# Altium PCB HVBoard_PCB.PcbDoc (part 2 of 2)
Units mm, origin at the board's own origin, x right, y up, seen from the top; angles counter-clockwise.
Board outline 140 x 60 mm, 2 copper layers (Top Layer, Bottom Layer); 89 components, 40 nets, 274 pads, 535 vias.
Unrouted connection lines stored in the file: 6.
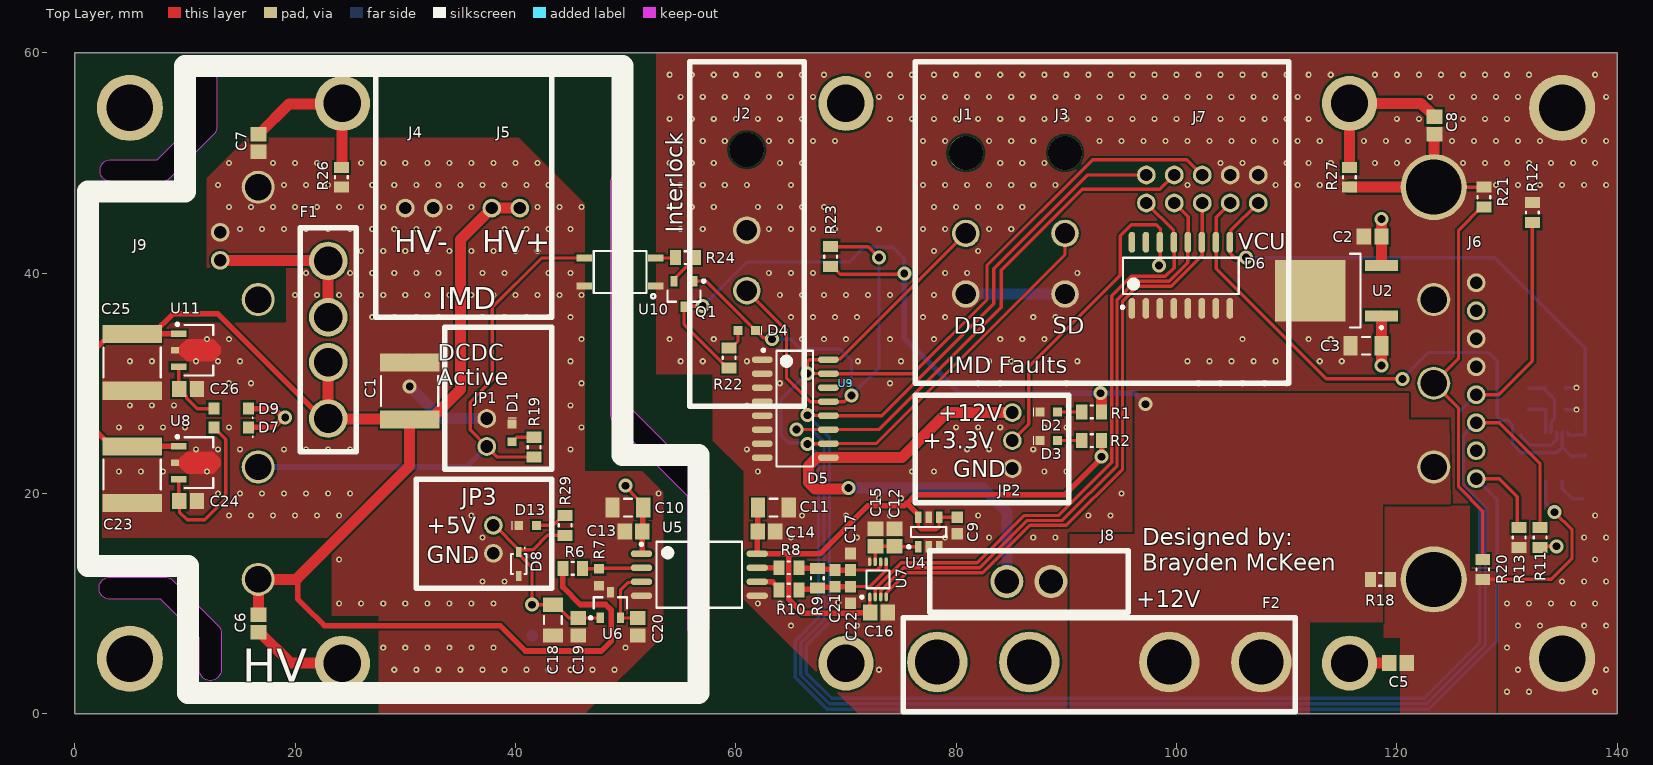
[diagram p0: Top Layer view]

## Part data (continued)
R24: library part 0805-1KR, "RES SMD 1K OHM 1% 1/8W 0805", Case Code (Imperial)=0805, Case Code (Metric)=2012, Manufacturer=Yageo, Manufacturer Part Number=RC0805FR-071KL, Max Operating Temperature=155°C, Max Power Dissipation=125mW, Min Operating Temperature=-55°C, Package Quantity=1, Resistance=1kR, Supplier Part Number 1=311-1.00KCRDKR-ND, Temperature Coefficient=100ppm/°C, Tolerance=1%, Voltage Rating=150V, Case/Package=0805, ComponentLink1Description=http://www.yageo.com/documents/recent/PYu-RC_Group_51_RoHS_L_10.pdf?src-supplier=Digi-Key, ComponentLink1URL=http://www.yageo.com/documents/recent/PYu-RC_Group_51_RoHS_L_10.pdf?src-supplier=Digi-Key, ComponentLink2Description=http://www.farnell.com/datasheets/1686128.pdf?src-supplier=Element14, ComponentLink2URL=http://www.farnell.com/datasheets/1686128.pdf?src-supplier=Element14, ComponentLink3Description=http://www.yageo.ru/pdf/RC0805.pdf?src-supplier=Future+Electronics, ComponentLink3URL=http://www.yageo.ru/pdf/RC0805.pdf?src-supplier=Future+Electronics, ComponentLink4Description=http://www.farnell.com/datasheets/2167052.pdf?src-supplier=Element14, ComponentLink4URL=http://www.farnell.com/datasheets/2167052.pdf?src-supplier=Element14, Composition="Thick Film", Depth=1.25mm, Features="Moisture Resistant", Height=0.024inch, Lead Free="Lead Free", Length=0.079inch, Military Standard=Not, Number of Pins=2, Number of Terminations=2, Packaging="Tape and Reel", Power Rating=125mW, Pricing 1="1=0.1, 10=0.04, 100=0.0163, 1000=0.00731, 2500=0.00635 (USD)", REACH SVHC=Unknown, Stock 1=21491700, Supplier 1=Digi-Key, Termination=SMD/SMT, Voltage Rating (DC)=150V, Width=0.049inch
R26 R27: library part 0805-10MR, "RES SMD 10M OHM 1% 1/8W 0805", Supplier Part Number 1=311-10.0MCRCT-ND, Supplier 1=Digi-Key
R29: library part 0805-665R, "RES SMD 665 OHM 1% 1/8W 0805", Case Code (Imperial)=0805, Case Code (Metric)=2012, Manufacturer=Panasonic, Manufacturer Part Number=ERJ-6ENF6650V, Max Operating Temperature=155°C, Max Power Dissipation=125mW, Min Operating Temperature=-55°C, Package Quantity=1, Supplier Part Number 1=P665CDKR-ND, Temperature Coefficient=100ppm/°C, Tolerance=1%, Voltage Rating=150V, Case/Package=0805, ComponentLink1Description=http://www.farnell.com/datasheets/1678782.pdf?src-supplier=Element14, ComponentLink1URL=http://www.farnell.com/datasheets/1678782.pdf?src-supplier=Element14, ComponentLink2Description=http://www.mouser.com/ds/2/315/AOA0000CE2-37512.pdf?src-supplier=Mouser, ComponentLink2URL=http://www.mouser.com/ds/2/315/AOA0000CE2-37512.pdf?src-supplier=Mouser, ComponentLink3Description=https://www.alliedelec.com/m/d/623f45ff1957d936ff56d46fd1c28cac.pdf?src-supplier=Allied+Electronics, ComponentLink3URL=https://www.alliedelec.com/m/d/623f45ff1957d936ff56d46fd1c28cac.pdf?src-supplier=Allied+Electronics, ComponentLink4Description=http://www.farnell.com/datasheets/1678782.pdf?src-supplier=Farnell, ComponentLink4URL=http://www.farnell.com/datasheets/1678782.pdf?src-supplier=Farnell, ComponentLink5Description=http://www.industrial.panasonic.com/www-data/pdf/AOA0000/AOA0000CE2.pdf?src-supplier=Element14, ComponentLink5URL=http://www.industrial.panasonic.com/www-data/pdf/AOA0000/AOA0000CE2.pdf?src-supplier=Element14, Composition="Thick Film", Contact Plating=Tin, Depth=1.25mm, Features="Automotive AEC-Q200", Height=0.6mm, Height - Seated (Max)=0.028inch, Lead Free="Lead Free", Length=2mm, Military Standard=Not, Mount="Surface Mount", Number of Terminations=2, Packaging="Tape and Reel", Power Rating=125mW, Pricing 1="1=0.1, 10=0.078, 100=0.0301, 1000=0.01324, 2500=0.01144 (USD)", REACH SVHC=Unknown, Resistance=665R, Stock 1=180910, Supplier 1=Digi-Key, Termination=SMD/SMT, Voltage Rating (DC)=150V, Width=0.049inch
U1: library part "PWR Monitor", "IC MONITOR PWR/CURR BIDIR 10MSOP", Case/Package=VSSOP, Input Bias Current=10uA, Input Offset Voltage (Vos)=2.5uV, Manufacturer="Texas Instruments", Manufacturer Part Number=INA226AIDGSR, Max Operating Temperature=125°C, Max Supply Voltage=5.5V, Min Operating Temperature=-40°C, Min Supply Voltage=2.7V, Nominal Supply Current=330uA, Output Current=10mA, Package Quantity=1, Accuracy=0.02%, Common Mode Rejection Ratio=140dB, ComponentLink1Description=http://www.ti.com/lit/ds/symlink/ina226.pdf?src-supplier=Digi-Key, ComponentLink1URL=http://www.ti.com/lit/ds/symlink/ina226.pdf?src-supplier=Digi-Key, ComponentLink2Description=http://www.ti.com/general/docs/lit/getliterature.tsp?genericPartNumber=INA226&&fileType=pdf&src-supplier=Avnet, ComponentLink2URL=http://www.ti.com/general/docs/lit/getliterature.tsp?genericPartNumber=INA226&&fileType=pdf&src-supplier=Avnet, ComponentLink3Description=http://www.ti.com/lit/gpn/ina226?src-supplier=Mouser, ComponentLink3URL=http://www.ti.com/lit/gpn/ina226?src-supplier=Mouser, ComponentLink4Description=http://www.farnell.com/datasheets/1840205.pdf?src-supplier=Element14, ComponentLink4URL=http://www.farnell.com/datasheets/1840205.pdf?src-supplier=Element14, Contact Plating=Gold, Lead Free="Lead Free", Mount="Surface Mount", Number of Pins=10, Packaging="Tape and Reel", Pricing 1="1=3.18, 10=2.856, 25=2.7, 100=2.22, 250=1.992, 500=1.92, 1000=1.596 (USD)", Radiation Hardening=No, REACH SVHC="No SVHC", Stock 1=12662, Supplier 1=Digi-Key, Supplier Part Number 1=296-29034-1-ND
U2: library part LDO-3.3V-500mA, "IC REG LINEAR 3.3V 500MA DPAK", Case/Package=DPAK, Dropout Voltage=230mV, Manufacturer="ON Semiconductor", Manufacturer Part Number=NCV5501DT33RKG, Max Input Voltage=16V, Max Operating Temperature=125°C, Max Output Current=500mA, Min Input Voltage=2.5V, Min Operating Temperature=-40°C, Min Output Voltage=3.3V, Output Voltage Accuracy=2.9%, Package Quantity=1, Supplier Part Number 1=NCV5501DT33RKGOSDKR-ND, Accuracy=2.9%, ComponentLink1Description=http://www.onsemi.com/pub_link/Collateral/NCP5500-D.PDF?src-supplier=Future+Electronics, ComponentLink1URL=http://www.onsemi.com/pub_link/Collateral/NCP5500-D.PDF?src-supplier=Future+Electronics, ComponentLink2Description=http://www.onsemi.cn/pub_link/Collateral/NCP5500-D.PDF?src-supplier=Avnet, ComponentLink2URL=http://www.onsemi.cn/pub_link/Collateral/NCP5500-D.PDF?src-supplier=Avnet, ComponentLink3Description=http://www.onsemi.com/pub/Collateral/NCP5500-D.PDF?src-supplier=Avnet, ComponentLink3URL=http://www.onsemi.com/pub/Collateral/NCP5500-D.PDF?src-supplier=Avnet, ComponentLink4Description=http://www.onsemi.com/pub/Collateral/NCP5500-D.PDF?src-supplier=Digi-Key, ComponentLink4URL=http://www.onsemi.com/pub/Collateral/NCP5500-D.PDF?src-supplier=Digi-Key, Contact Plating=Tin,Matte, Height=2.38mm, Lead Free="Lead Free", Length=6.73mm, Min Current Limit=500mA, Mount="Surface Mount", Nominal Output Voltage=3.3V, Number of Outputs=1, Number of Pins=3, Number of Regulators=1, Output Current=500mA, Output Type=Fixed, Output Voltage=3.3V, Packaging="Tape and Reel", Polarity=Positive, Pricing 1="1=0.8, 10=0.7, 25=0.6576, 100=0.4984, 250=0.4242, 500=0.403, 1000=0.30755 (USD)", Radiation Hardening=No, REACH SVHC="No SVHC", Stock 1=921, Supplier 1=Digi-Key, Width=6.22mm
U3: library part DCDC200V-12V, "DC DC CONVERTER 12V 500W", Case/Package="Full Brick", Isolation Voltage=3kV, Manufacturer=Vicor, Max Input Voltage=200V, Max Operating Temperature=100°C, Max Output Current=41.67A, Max Power Dissipation=500W, Min Input Voltage=100V, Min Operating Temperature=-20°C, Output Voltage=12V, Package Quantity=1, Supplier Part Number 1=1102-1229-ND, ComponentLink1Description=http://cdn.vicorpower.com/documents/datasheets/ds_150vin-maxi-family.pdf?src-supplier=Future+Electronics, ComponentLink1URL=http://cdn.vicorpower.com/documents/datasheets/ds_150vin-maxi-family.pdf?src-supplier=Future+Electronics, ComponentLink2Description=http://cdn.vicorpower.com/documents/datasheets/ds_150vin-maxi-family.pdf?src-supplier=Digi-Key, ComponentLink2URL=http://cdn.vicorpower.com/documents/datasheets/ds_150vin-maxi-family.pdf?src-supplier=Digi-Key, Efficiency=87.6%, Features=UVLO,OVP, Height=0.62inch, Isolation=Isolated, Lead Free="Contains Lead", Length=4.6inch, Manufacturer Part Number=V150A12C500BL, Mount="Through Hole", Number of Outputs=1, Output Power=500W, Packaging=Bulk, Pricing 1="1=313.93, 10=303.804 (USD)", Stock 1=3, Supplier 1=Digi-Key, Voltage - Output 1=12V, Width=2.2inch
U4: library part "VREF 2.048V 0.1%", "IC VREF SERIES 0.1% SOT23-6", Supplier 1=Digi-Key, Supplier Part Number 1=MCP1501T-20E/CHYCT-ND
U5: library part OPAMP-ISO-AMC1301DWVR, "IC OPAMP ISOLATION 1 CIRC 8SOIC", Case/Package=SOIC, Input Bias Current=60uA, Input Offset Voltage (Vos)=50uV, Isolation Voltage=1kV, Manufacturer="Texas Instruments", Manufacturer Part Number=AMC1301DWVR, Max Operating Temperature=125°C, Min Operating Temperature=-40°C, Operating Supply Current=5.9mA, Output Current per Channel=13mA, Supplier Part Number 1=296-44577-6-ND, Bandwidth=210kHz, ComponentLink1Description=http://www.ti.com/lit/wp/sszy024/sszy024.pdf?src-supplier=Digi-Key, ComponentLink1URL=http://www.ti.com/lit/wp/sszy024/sszy024.pdf?src-supplier=Digi-Key, ComponentLink2Description=http://www.ti.com/lit/ds/symlink/amc1301.pdf?src-supplier=Farnell, ComponentLink2URL=http://www.ti.com/lit/ds/symlink/amc1301.pdf?src-supplier=Farnell, ComponentLink3Description=http://www.farnell.com/datasheets/2113482.pdf?src-supplier=Element14, ComponentLink3URL=http://www.farnell.com/datasheets/2113482.pdf?src-supplier=Element14, Gain Bandwidth Product=1MHz, Lead Free="Lead Free", Mount="Surface Mount", Number of Amplifiers=1, Number of Circuits=1, Number of Pins=8, Packaging="Cut Tape", Pricing 1="1=6.07, 10=5.487, 25=5.2316, 100=4.3384, 250=3.9556, 500=3.7004 (USD)", REACH SVHC="No SVHC", Stock 1=2458, Supplier 1=Digi-Key
U6: library part "VREF 1.5V 0.2%", "IC VREF SERIES 0.2% SOT23-3", Supplier 1=Digi-Key, Supplier Part Number 1=ISL21010CFH315Z-TKCT-ND
U7: library part ADC-ADS7044IDCUR, "IC ADC 12BIT SAR 8VSSOP", Case/Package=SOP, Manufacturer="Texas Instruments", Manufacturer Part Number=ADS7044IDCUT, Max Dual Supply Voltage=3.6V, Max Operating Temperature=125°C, Max Power Dissipation=900uW, Min Dual Supply Voltage=1.8V, Min Operating Temperature=-40°C, Package Quantity=250, Supplier Part Number 1=296-39578-6-ND, ComponentLink1Description=http://www.ti.com/general/docs/lit/getliterature.tsp?genericPartNumber=ADS7044&&fileType=pdf&src-supplier=Avnet, ComponentLink1URL=http://www.ti.com/general/docs/lit/getliterature.tsp?genericPartNumber=ADS7044&&fileType=pdf&src-supplier=Avnet, ComponentLink2Description=http://www.ti.com/lit/ds/symlink/ads7044.pdf?src-supplier=Digi-Key, ComponentLink2URL=http://www.ti.com/lit/ds/symlink/ads7044.pdf?src-supplier=Digi-Key, ComponentLink3Description=http://www.ti.com/lit/gpn/ads7044?src-supplier=Mouser, ComponentLink3URL=http://www.ti.com/lit/gpn/ads7044?src-supplier=Mouser, Contact Plating=Gold, Integral Nonlinearity (INL)=2LSB, Interface=SPI, Lead Free="Lead Free", Max Supply Voltage=3.6V, Mount="Surface Mount", Number of A/D Converters=1, Number of Analog Inputs=1, Number of Bits=12, Number of Channels=1, Number of Inputs=1, Number of Pins=8, Packaging="Tape and Reel", Polarity=Unipolar, Pricing 1="1=2.66, 10=2.385, 25=2.2544, 100=1.8537 (USD)", Resolution=12b, Sampling Rate=1MS/s, Signal to Noise Ratio (SNR)=71dB, Stock 1=68, Supplier 1=Digi-Key, Supply Type=Analog,Digital, Weight=0.030018oz
U8 U11: library part LDO-5V-10mA, "IC REG LINEAR  5V 10MA SOT89-3", Case/Package=SOT-89, Manufacturer="ON Semiconductor", Manufacturer Part Number=NCP785AH50T1G, Max Input Voltage=450V, Max Operating Temperature=85°C, Min Current Limit=10.5mA, Min Input Voltage=85V, Min Input Voltage (DC)=55V, Min Operating Temperature=-40°C, Nominal Output Voltage=12V, Output Current=10mA, Quiescent Current=22uA, Reference Voltage=1.25V, Supplier Part Number 1=NCP785AH120T1GOSDKR-ND, Accuracy=5%, ComponentLink1Description=http://www.onsemi.com/pub/Collateral/NCP785A-D.PDF?src-supplier=Digi-Key, ComponentLink1URL=http://www.onsemi.com/pub/Collateral/NCP785A-D.PDF?src-supplier=Digi-Key, ComponentLink2Description=http://www.farnell.com/datasheets/1948370.pdf?src-supplier=Farnell, ComponentLink2URL=http://www.farnell.com/datasheets/1948370.pdf?src-supplier=Farnell, ComponentLink3Description=http://www.farnell.com/datasheets/1948370.pdf?src-supplier=Element14, ComponentLink3URL=http://www.farnell.com/datasheets/1948370.pdf?src-supplier=Element14, ComponentLink4Description=http://uk.rs-online.com/webdocs/141c/0900766b8141c022.pdf?src-supplier=RSComponents, ComponentLink4URL=http://uk.rs-online.com/webdocs/141c/0900766b8141c022.pdf?src-supplier=RSComponents, ComponentLink5Description=http://www.onsemi.com/pub/Collateral/NCP785A-D.PDF?src-supplier=Avnet, ComponentLink5URL=http://www.onsemi.com/pub/Collateral/NCP785A-D.PDF?src-supplier=Avnet, Height=1.6mm, Lead Free="Lead Free", Length=4.6mm, Max Input Voltage (DC)=450V, Mount="Surface Mount", Number of Outputs=1, Number of Pins=3, Number of Regulators=1, Output Type=Fixed, Output Voltage=12V, Packaging="Cut Tape", Polarity=Positive, Pricing 1="1=0.83, 10=0.738, 25=0.7, 100=0.5375, 250=0.475, 500=0.45, 1000=0.35 (USD)", REACH SVHC="No SVHC", Stock 1=2397, Supplier 1=Digi-Key, Width=2.6mm
U9: library part IMD-ir155-3402, "ISOMETER iso-F1 IR155-3204"
U10: library part Photocoupler, "X36 PB-F PHOTOCOUPLER SO6 ROHS T", Supplier 1=Digi-Key, Supplier Part Number 1=TLP184(V4GBTRSE-ND

## Via types
v1: diameter 0.55, hole 0.25, Top Layer to Bottom Layer, 511 vias
v2: diameter 1.27, hole 0.711, Top Layer to Bottom Layer, 24 vias

## Nets (pads, with @x,y where several pads share a name; then routed paths per layer and width w, separated by ;. In a path a pad name is that pad's centre, name@x,y a point inside that pad or via, vN(x,y) a via of type N, cw(c..) or ccw(c..) an arc to the next point about the centre after c; other vN are vias at no path point)
+3.3-LV: C2.2 C4.1 C9.2 C11.1 C14.1 C16.2 D6.14 JP2.2 R2.2 R3.2 R4.2 R5.2 R14.2 R15.2 U1.6 U2.3 U4.4 U4.6 U5.8 U7.1 | length 96.8
  Top Layer w0.3: U7.1 72.15,9.25 C16.2 ; U4.6 76.55,16.95 76.8,16.7 78.2,16.7 78.45,16.95 U4.4 C9.2 ; JP2.2 86.6,26.3 86.6,31.5 94.905,39.805 94.905,43.405 95.9,44.4 98.171,44.4 98.54,44.031 98.54,42.92 98.52,42.9 98.52,40.82 v2(98.4,40.7)
  Top Layer w0.5: C11.1@62.002,18.695 62.002,16.572 C14.1 61.962,16.531 61.962,14.545 U5.8 64.817,14.522 ; C16.2 72.152,9.152 71.093,9.152 71.066,9.125 66.075,9.125 65.055,10.145 65.051,10.145 64.817,10.379 64.817,12.061 64.817,14.522 ; U4.6 76.55,18.075 75.525,19.1 ; R2.2 93.2,23.2 89.9,19.9 76.325,19.9 75.525,19.1 ; 64.817,14.522 67.622,14.522 71.986,18.886 75.28,18.886 75.493,19.1 75.525,19.1
  Top Layer w1: v2(118.6,44.9) C2.2 U2.3 U2.3@119.6,40.69
  other v2: 93.2,23.335
+5-HV: C10.2 C13.2 C18.2 C19.2 D7.1 D8.1 D9.1 JP3.2 R29.2 U5.1 U6.1 | length 34
  Top Layer w0.3: JP3.2 38.1,17.1 D8.1@40.3,14.9 ; R29.2 42.9,16.2 41.6,14.9 D8.1@40.3,14.9 ; U6.1 C19.2 44.85,8.7 43.65,9.9 C18.2 43.385,9.915 43.37,9.9 v2(41.5,9.9) 41.5,13.3 40.3,14.5 D8.1 D8.1@40.3,14.9 ; v2(50,20.7) 50,20.6 51.112,19.488 51.112,19.213 C10.2
  Top Layer w0.5: D7.1 18.041,26 18.892,26.85 18.892,26.9 18.092,27.7 D9.1 ; U5.1 51.474,14.522 51.52,14.568 C13.2 51.566,16.6 C10.2@51.566,18.667
  other v2: 19.1,26.9
+12: C3.2 F2.2 J6.7 Q1.2 R1.2 R11.2 R18.2 R22.1 R23.1 U1.8 U1.9 U2.1 U3.8 | length 77.2
  Top Layer w0.3: v2(57,37) 55.375,37 Q1.2 55.3,35.325 59.225,31.4 R22.1 ; R23.1@68.425,40.6 R23.1 68.775,40.6 69.475,39.9 75.24,39.9 v2(75.29,39.95) ; R11.2@133.02,15.08 R11.2 133.1,15.2 v2(134.5,15.2)
  Top Layer w1: v2(93.1,29.1) 93.1,29.027 93.2,28.927 R1.2 ; v2(118.6,31.6) C3.2 U2.1 ; U3.8@123.25,22.4 U3.8@123.3,22.35
  Bottom Layer w0.3: v2(57,37) 61,41 70.276,41 71.611,42.335 74.265,42.335 75.29,41.31 v2(75.29,39.95)
  Bottom Layer w0.5: v2(75.29,39.95) 75.29,34.11 80.3,29.1 v2(93.1,29.1) 96.2,29.1 v2(97.2,28.1) ; F2.2@99.35,4.7 F2.2@99.4,4.75
  Bottom Layer w1: F2.2@107.75,4.7 F2.2@108.1,5.05
GND-HV: C1.1 C7.2 C10.1 C13.1 C18.1 C19.1 C20.1 C23.1 C24.1 C25.1 C26.1 D1.2 D8.2 D13.2 J4.1 J4.2 J9.1 JP1.1 JP3.1 R7.1 R26.1 U3.4 U5.4 U6.2 U8.2 U10.6 U11.2 | length 9.2
  Top Layer w1: C7.2@16.675,50.975 C7.2 ; C1.1@30,32.2 C1.1@30.325,31.875 ; C1.1 C1.1@30.725,32.2
  Bottom Layer w1: v2(30.4,29.7) 33.3,26.8 JP1.1 ; 41.5,7.1 41.535,7.065
  other v1: 28,2 30,2 32,2 34,2 36,2 38,2 40,2 42,2 44,2 46,2 29,4 31,4 33,4 35,4 37,4 39,4 41,4 43,4 45,4 47,4 49,4 28,6 30,6 32,6 34,6 36,6 38,6 50,6 24,10 26,10 28,10 30,10 32,10 34,10 36,10 38,10 37,12 39,12 24,14 36,14 37,16 14,18 16,18 18,18 20,18 22,18 24,18 36,18 13,20 15,20 17,20 19,20 21,20 23,20 25,20 53,20 4,22 6,22 8,22 12,22 11,24 13,24 15,24 19,24 21,24 23,24 25,24 45,24 4,26 6,26 8,26 10,26 14,26 46,26 5,28 7,28 9,28 45,28 14,30 16,30 46,30 5,32 7,32 11,32 13,32 15,32 45,32 12,34 14,34 46,34 27,36 29,36 31,36 33,36 37,36 39,36 41,36 43,36 45,36 20,38 22,38 24,38 26,38 28,38 30,38 32,38 34,38 36,38 38,38 40,38 42,38 44,38 46,38 21,40 25,40 27,40 29,40 31,40 33,40 37,40 39,40 43,40 45,40 26,42 28,42 30,42 32,42 34,42 36,42 38,42 40,42 42,42 15,44 17,44 19,44 21,44 23,44 25,44 27,44 29,44 31,44 33,44 39,44 41,44 43,44 45,44 14,46 16,46 18,46 20,46 22,46 24,46 26,46 28,46 34,46 36,46 42,46 44,46 46,46 13,48 19,48 21,48 23,48 27,48 29,48 31,48 33,48 35,48 37,48 39,48 41,48 43,48 14,50 18,50 20,50 22,50 26,50 28,50 30,50 32,50 34,50 36,50 38,50 40,50 42,50
GND-LV: C2.1 C3.1 C4.2 C8.2 C9.1 C11.2 C12.1 C14.2 C15.2 C16.1 C17.2 C22.1 D2.2 D3.2 D5.1 D5.2 D5.3 D5.4 D5.5 D5.6 D5.7 D5.8 D6.1 D6.2 D6.3 D6.4 D6.5 D6.6 D6.7 D6.8 J1.1 J2.2 J3.1 J6.5 J6.6 J6.8 J7.1 J7.2 J8.2 JP2.3 R12.1 R13.1 R16.1 R17.1 R21.2 R27.2 U1.7 U2.2 U3.5 U3.6 U4.2 U4.3 U4.5 U5.5 U7.8 U9.1 U10.1 | length 31.1
  Top Layer w0.3: U3.5 R21.2
  Top Layer w1: R27.2 U3.5 123.375,47.825 123.375,52.575 C8.2
  Bottom Layer w0.3: U1.7 135.001,20.441 135.942,19.5 C4.2 ; R17.1 135.319,27.6 v1(136.3,27.6) ; R16.1 135.324,29.6 v1(136.3,29.6)
  Bottom Layer w1: J1.1 J3.1
  other v1: 130,2 132,2 138,2 73,4 131,4 139,4 130,6 65,8 71,8 131,8 133,8 137,8 139,8 62,10 64,10 130,10 132,10 134,10 136,10 138,10 69.3,10.1 135,12 137,12 139,12 138,14 65,16 71,16 79,16 83,16 87,16 89,16 137,16 139,16 66,18 70,18 74,18 82,18 92,18 94,18 138,18 73,19.561 75,19.561 95,20 62,22 76,22 78,22 88,22 90,22 61,24 81,24 83,24 87,24 80,26 82,26 84,26 88,26 90,26 61,28 64,30 74,30 82,30 84,30 90,30 102,30 104,30 106,30 108,30 110,30 55,32 57,32 61,32 71.075,32 75,32 83,32 85,32 91,32 101,32 103,32 105,32 107,32 109,32 113,32 115,32 54,34 58,34 66,34 68,34 70,34 74,34 78,34 84,34 86,34 88,34 106,34 112,34 114,34 65,36 67,36 69,36 71,36 77,36 79,36 87,36 89,36 64,38 66,38 68,38 70,38 72,38 74,38 78,38 63,40 65,40 67,40 79,40 81,40 91,40 78,42 82,42 55,44 57,44 63,44 65,44 67,44 69,44 73,44 77,44 79,44 83,44 85,44 54,46 56,46 58,46 62,46 64,46 66,46 68,46 78,46 80,46 82,46 84,46 86,46 55,48 57,48 59,48 61,48 65,48 77,48 79,48 81,48 83,48 85,48 87,48 89,48 101,48 109,48 111,48 113,48 129,48 131,48 133,48 135,48 137,48 139,48 54,50 56,50 58,50 64,50 66,50 78,50 84,50 86,50 88,50 104,50 106,50 110,50 112,50 114,50 118,50 120,50 126,50 128,50 130,50 132,50 134,50 136,50 138,50 55,52 57,52 59,52 63,52 65,52 67,52 69,52 77,52 79,52 83,52 85,52 87,52 93,52 95,52 97,52 99,52 101,52 103,52 105,52 107,52 109,52 111,52 113,52 117,52 119,52 121,52 125,52 127,52 129,52 131,52 133,52 137,52 139,52 54,54 56,54 58,54 60,54 62,54 64,54 66,54 74,54 76,54 78,54 80,54 82,54 84,54 86,54 88,54 90,54 92,54 94,54 96,54 98,54 100,54 102,54 104,54 106,54 108,54 110,54 112,54 120,54 122,54 126,54 128,54 130,54 55,56 57,56 59,56 61,56 63,56 65,56 67,56 73,56 75,56 77,56 79,56 81,56 83,56 85,56 87,56 89,56 91,56 93,56 95,56 97,56 99,56 101,56 103,56 105,56 107,56 109,56 111,56 123,56 125,56 127,56 129,56 131,56 139,56 54,58 56,58 58,58 60,58 62,58 64,58 66,58 68,58 72,58 74,58 76,58 78,58 80,58 82,58 84,58 86,58 88,58 90,58 92,58 94,58 96,58 98,58 100,58 102,58 104,58 106,58 108,58 110,58 112,58 114,58 118,58 120,58 122,58 124,58 126,58 128,58 130,58 132,58 138,58
NetC1_2: C1.2 C6.2 C23.2 C25.2 F1.2 J5.1 J5.2 R6.1 U3.1 U8.1 U11.1 | length 151.8
  Top Layer w0.5: U8.1 5.225,24.3 C23.2 3.325,24.275 1.4,26.2 1.4,32.6 3.3,34.5 C25.2@7.1,34.5 ; U11.1 C25.2@7.1,34.5 ; 20.225,12.3 20.225,10.425 20.8,9.85 22.65,8 38.6,8 40.9,5.7 47.8,5.7 48.7,6.6 48.7,9.4 48.18,9.92 45.88,9.92 44.3,11.5 R6.1 ; F1.2@23,26.8 22.5,26.8 13,36.3 8.9,36.3 C25.2@7.1,34.5
  Top Layer w1: C6.2 16.675,9.025 16.675,12.175 U3.1 20.125,12.2 20.225,12.3 ; 20.1,12.2 30.4,22.5 C1.2 ; F1.2@23,31.9 23,26.8 23.037,26.762 30.363,26.762 C1.2 ; J5.1 J5.2 35,43.04 35,29.45 32.275,26.725 C1.2
  Bottom Layer w0.5: F1.2@22.6,32.3 F1.2@23,31.9
NetC5_1: C5.1 C6.1 C7.1 C8.1 R26.2 R27.1 U3.10 | length 41.2
  Top Layer w1: C6.1 16.775,7.4 19.575,4.6 U3.10@24.3,4.6 ; C7.1 19.45,55.35 24.25,55.35 24.25,49.6 R26.2 ; U3.10@115.7,4.6 C5.1 119.3,4.675 C5.1@119.15,4.825 ; R27.1 115.7,55.4 122.2,55.4 123.175,54.425 123.175,54.35 123.325,54.2 C8.1
NetC5_2: C5.2 R18.1 R20.2 U1.10 U3.9 | length 17.5
  Top Layer w0.3: R18.1@119.4,12.1 R18.1@119.5,12.2 ; R20.2 134,12.2 135.9,14.1 135.9,16.7 v2(134.3,18.3)
  Top Layer w1: C5.2 C5.2@120.925,4.575 ; U3.9@123.325,12.175 U3.9
  Bottom Layer w0.3: U3.9@123.05,12.5 U3.9 ; U1.10 133.501,19.099 v2(134.3,18.3)
NetC12_2: C12.2 C15.1 U4.1 U7.7 | length 5.3
  Top Layer w0.3: U7.7 72.65,15.15 C15.1 C12.2 74.45,15.15 U4.1
NetC17_1: C17.1 C21.2 R8.2 R9.2 U7.6 | length 8.1
  Top Layer w0.3: C17.1 72.786,13.05 73.15,13.414 U7.6
  Top Layer w0.5: R8.2 65.743,13.226 67.374,13.226 R9.2 67.475,13.125 68.925,13.125 C21.2 C17.1
NetC20_2: C20.2 U5.3 U6.3 | length 7
  Top Layer w0.3: U5.3@50.764,11.982 U5.3 51.382,11.925 50.764,11.925 50.225,11.925 49.53,11.23 U6.3 C20.2
NetC21_1: C21.1 C22.2 R9.1 R10.2 U7.5 | length 9.4
  Top Layer w0.3: C22.2 72.15,11.55 73.65,13.05 U7.5
  Top Layer w0.5: R10.2 65.807,11.31 67.31,11.31 R9.1 67.475,11.475 68.925,11.475 C21.1 C22.2
NetC24_2: C24.2 D7.2 U8.3 | length 15.2
  Top Layer w0.3: U8.3 9.45,19.35 C24.2 9.5,18.3 10.2,17.6 11.8,17.6 13.7,19.5 13.7,24.9 12.65,25.95 D7.2
NetC26_2: C26.2 D9.2 U11.3 | length 6
  Top Layer w0.3: U11.3 9.45,29.55 C26.2 9.5,29.425 10.15,28.775 10.15,28.651 11.101,27.7 D9.2
NetD1_1: D1.1 R19.1 | length 2.2
  Top Layer w0.3: D1.1 40.1,25.1 R19.1
NetD2_1: D2.1 R1.1 | length 2.2
  Top Layer w0.3: D2.1 R1.1
NetD3_1: D3.1 R2.1 | length 2.2
  Top Layer w0.3: D3.1 R2.1
NetD4_1: D4.1 R22.2 | length 2
  Top Layer w0.3: R22.2 59.575,33.2 60.2,33.825 D4.1
NetD4_2: D4.2 D5.13 J2.1 Q1.1 R23.2 | length 55.2
  Top Layer w0.3: Q1.1 57.325,39.275 61.55,35.05 D4.2 62.474,34.126 63.174,34.126 v2(63.3,34) ; J2.1 64.6,34.8 64.6,30.5 66.765,28.335 69.85,28.335 70.415,28.9 v2(70.5,28.9) ; R23.2 72,42.4 v2(73,41.4)
  Bottom Layer w0.3: v2(63.3,34) 65,34 65.9,33.1 69.5,33.1 70.5,32.1 v2(70.5,28.9) 73,31.4 v2(73,41.4)
NetD5_9: D5.9 F2.1 J8.1 JP2.1 | length 47.5
  Top Layer w1: v2(70.218,20.486) 70.145,20.486 70.058,20.4 67.186,20.4 66.6,20.986 66.6,22.5 67.355,23.255 75.072,23.255 79.157,27.34 JP2.1
  Bottom Layer w1: v2(70.218,20.486) 82.414,20.486 84.6,18.3 J8.1
NetD5_10: D5.10 D5.15 D5.16 J1.2 J3.2 J6.1 J7.3 R13.2 | length 221.1
  Top Layer w0.3: v2(66.5,24.5) 66.513,24.513 68.387,24.513 D5.10 72.725,24.525 89.88,41.68 J3.2 ; J1.2 69.493,32.213 69.38,32.213 69.37,32.202 68.507,32.202 68.45,32.145 66.676,32.145 66.5,31.969 v2(66.5,30.9) 66.512,30.888 68.437,30.888 68.45,30.875 76.075,30.875 82.8,37.6 82.8,40.7 92.4,50.3 100.94,50.3 J7.3 ; J6.1 129.285,21.34 130.925,19.7 130.925,17.075 R13.2
  Bottom Layer w0.3: v2(66.5,30.9) 64.1,28.5 64.1,25.3 64.8,24.6 66.4,24.6 v2(66.5,24.5) 67.5,23.5 67.5,8.7 65.4,6.6 65.4,3.3 68.3,0.4 122.9,0.4 129.111,6.611 129.111,19.429 J6.1
NetD5_11: D5.11 J6.3 J7.4 R11.1 | length 171.3
  Top Layer w0.3: v2(65.5,25.8) 65.502,25.797 68.398,25.797 D5.11 72.995,25.795 84.1,36.9 84.1,40.264 91.436,47.6 98.5,47.6 J7.4 ; J6.3 129.28,26.42 133,22.7 133,16.7 R11.1@132.9,16.6
  Bottom Layer w0.3: v2(65.5,25.8) 66.9,25.8 68,24.7 68,8.5 65.9,6.4 65.9,3.5 68.5,0.9 122.7,0.9 128.04,6.24 128.04,18.76 126.05,20.75 126.05,25.27 J6.3
NetD5_12: D5.12 J6.4 J7.5 R12.2 | length 173.9
  Top Layer w0.3: v2(66.5,27.1) 66.517,27.083 68.382,27.083 D5.12 73.265,27.065 83.4,37.2 83.4,40.4 91.9,48.9 J7.5 ; J6.4 129.24,28.96 132.3,32.02 R12.2
  Bottom Layer w0.3: v2(66.5,27.1) 68.5,25.1 68.5,8.3 66.4,6.2 66.4,3.7 68.7,1.4 122.5,1.4 127.5,6.4 127.5,18.6 125.6,20.5 125.6,27.36 J6.4
NetD6_9: D6.9 J7.10 R4.1 U1.5 | length 51.1
  Top Layer w0.3: v2(106.3,41.4) 105.3,41.4 104.89,41.81 104.89,42.88 104.87,42.9 104.927,42.957 104.927,43.867 J7.10
  Bottom Layer w0.3: v2(106.3,41.4) 128.9,41.4 137.1,33.2 R4.1 135.501,25.3 U1.5
NetD6_10: D6.10 J7.9 R3.1 U1.4 | length 54.9
  Top Layer w0.3: J7.9 103.6,45.08 103.6,42.9 103.6,40.4 113.6,30.4 v2(120.5,30.4)
  Bottom Layer w0.3: v2(120.5,30.4) 122.9,32.8 128.3,32.8 129.1,32 129.1,27 129.45,26.65 130.05,26.65 130.5,26.2 130.5,24.501 131.301,23.7 134.502,23.7 135.001,24.199 ; U1.4 135.001,24.199 ; R3.1@137.1,23.575 R3.1 135.8,23.4 135.001,24.199
NetD6_11: D6.11 J7.8 U7.4 | length 55.4
  Top Layer w0.3: U7.4 73.65,10.95 75.5,12.8 82.4,12.8 86.7,17.1 90,17.1 95.1,22.2 95.1,37.444 96.456,38.8 99.536,38.8 102.335,41.599 102.335,42.8 102.335,46.355 J7.8
NetD6_12: D6.12 J7.7 U7.3 | length 55.6
  Top Layer w0.3: U7.3 73.15,11.15 75.25,13.25 82.15,13.25 86.45,17.55 89.65,17.55 94.6,22.5 94.6,37.6 96.25,39.25 99.35,39.25 101.025,40.925 101.025,42.865 101.06,42.9 101.06,45.1 J7.7
NetD6_13: D6.13 J7.6 U7.2 | length 55.7
  Top Layer w0.3: U7.2 72.65,11.35 75,13.7 81.9,13.7 86.2,18 89.322,18 94.135,22.813 94.135,37.935 95.9,39.7 99,39.7 99.79,40.49 D6.13@99.79,42.9 ; J7.6 99.733,43.887 99.733,42.945 D6.13@99.777,42.9
NetD13_1: D13.1 R29.1 | length 3
  Top Layer w0.3: D13.1 43.425,17.1 44.325,18 R29.1
NetF1_1: F1.1 J9.2 | length 14.9
  Top Layer w1: J9.2 13.23,41.13 22.97,41.13 23,41.1 F1.1@23,36
NetJP1_2: JP1.2 R19.2 U3.2 U10.4 | length 50.9
  Top Layer w0.3: R19.2@41.875,23.3 R19.2 38.36,23.3 JP1.2 35.9,25.76 35.9,28.3 37.9,30.3 37.9,36.9 42.37,41.37 U10.4
  Bottom Layer w0.3: U3.2 U3.2@16.83,22.58
  Bottom Layer w0.5: U3.2 35.54,22.4 JP1.2
NetQ1_3: Q1.3 R24.2 | length 3
  Top Layer w0.3: Q1.3 54.385,39.425 55.835,40.875 55.992,40.875 56.342,41.225 R24.2
NetR5_1: R5.1 R16.2 U1.2 | length 6
  Bottom Layer w0.3: R5.1 R16.2 133.474,29.375 134.3,28.549 134.3,26.8 134.001,26.501 U1.2
NetR6_2: R6.2 R7.2 U5.2 | length 5.7
  Top Layer w0.3: R6.2 46.125,13.175 47.225,13.175 R7.2 ; R7.2@47.225,13.2 47.239,13.214 47.6,13.214 51.4,13.214 U5.2
NetR8_1: R8.1 U5.7 | length 2
  Top Layer w0.5: U5.7 R8.1
NetR10_1: R10.1 U5.6 | length 2.4
  Top Layer w0.5: U5.6 61.958,11.963 63.349,11.963 63.917,11.395 R10.1
NetR14_1: R14.1 R17.2 U1.1 | length 3.6
  Bottom Layer w0.3: R14.1 R17.2 133.501,27.618 U1.1
NetR15_1: R15.1 U1.3 | length 4.5
  Bottom Layer w0.3: R15.1 131.3,25.125 132.025,24.4 134,24.4 134.195,24.595 134.205,24.595 134.501,24.891 U1.3
NetR20_1: R20.1 R21.1 U3.7 | length 35.8
  Top Layer w0.3: R20.1 127.8,18.4 125.6,20.6 125.6,27.75 U3.7 125.6,32.25 125.6,43.875 127.725,46 R21.1
NetR24_1: R24.1 U10.3 | length 1.8
  Top Layer w0.3: U10.3 54.512,41.37 R24.1
pads on no net: D5.14 D6.15 D6.16 J1.3 J2.3 J3.3 J6.2 U3.3

## Polygon pours and split planes (outlines as drawn)
GND-LV on Bottom Layer "GND-LV_L02_P007" (solid, remove dead copper, pour order 7): 52.8,60 140,60 140,0 71.1,0 60.7,10.4 60.7,22 57.9,24.8 57.9,30.833 52.8,30.771
GND-HV on Bottom Layer "GND-HV_L02_P011" (solid, remove dead copper, pour order 11): 15.7,52.3 40.3,52.3 46.3,46.3 46.3,22 51.5,22 53.4,20.1 53.4,7.1 46.3,0 27.6,0 27.6,8.9 23.342,8.9 23.342,16 2.6,16 2.6,35.5 12,35.5 12,40.5 12,48.6
+5-HV on Bottom Layer "+5-HV_L02_P009" (solid, remove dead copper, pour order 9): 17.4,33.7 44.2,33.7 44.2,22 50,22 52.7,19.3 52.7,8 39.9,8 39.9,19.9 35.2,19.9 35.2,10.7 25.395,10.7 25.53,24.7 17.4,24.7
NetD5_9 on Bottom Layer "NETD5_9_L02_P004" (solid, remove dead copper, pour order 4): 74.4,0 74.4,14.8 95.3,14.8 95.3,0
+12 on Bottom Layer "+12_L02_P003" (solid, remove dead copper, pour order 3): 128.8,38.3 115.5,38.3 115.5,26.4 121.846,20.054 121.846,13.6 135.6,13.6 135.6,22.9 128.8,22.9
+3.3-LV on Bottom Layer "+3.3-LV_L02_P002" (solid, remove dead copper, pour order 2): 91.9,21.9 91.9,46.4 140,46.4 140,20.3 136.4,20.3 134.4,22.3 129.4,22.3 129.4,38.4 100,38.4 100,21.9
GND-LV on Top Layer "GND-LV_L01_P010" (solid, remove dead copper, pour order 10): 52.8,60 140.005,60 140.005,0 71.1,0 60.7,10.4 60.7,22 57.9,24.8 57.9,30.833 52.8,30.77
GND-HV on Top Layer "GND-HV_L01_P008" (solid, remove dead copper, pour order 8): 15.7,52.3 40.3,52.3 46.3,46.3 46.3,22 51.5,22 53.4,20.1 53.4,7.1 46.3,0 27.6,0 27.6,8.9 23.342,8.9 23.342,16 2.5,16 2.5,35.5 19.2,35.5 19.2,40.5 12,40.5 12,48.6
+12 on Top Layer "+12_L01_P005" (solid, remove dead copper, pour order 5): 124.754,26.7 121.1,26.7 121.1,29.1 96.2,29.1 96.2,16.3 90.3,16.3 90.3,0 112.1,0 112.1,8.3 118.7,8.3 118.7,19 124.915,19
NetC5_2 on Top Layer "NETC5_2_L01_P006" (solid, remove dead copper, pour order 6): 118.8,6.9 120.3,6.9 120.3,0 129,0 129,12.92 126.6,12.95 126.6,18.9 118.8,18.9

## Silkscreen, mask and mechanical layers (free items; w line width, h text height)
Top Overlay:
  lines w0.5: 27.3,36 43.3,36 43.3,59.1 27.3,59.1 27.3,36 ; 31,11.4 43.3,11.4 43.3,21.3 31,21.3 31,11.4 ; 33.6,22.2 43.3,22.2 43.3,35.1 33.6,35.1 33.6,22.2 ; 55.8,27.9 55.8,59.2 66.2,59.2 66.2,27.9 55.8,27.9 ; 76.28,30 76.28,59.2 110.18,59.2 110.18,30 76.28,30 ; 76.3,19.138 76.3,28.9 90.2,28.9 90.2,19.138 76.3,19.138
  lines w2: 10.3,1.9 10.3,13.4 1.2,13.4 1.2,47.4 10,47.4 10,58.8 49.7,58.8 49.7,23.5 56.6,23.5 56.6,1.9 10.3,1.9 ; 10.3,1.9 10.3,1.9
  text "Interlock" at 55.2,43.652 h1.52 r90
  text "VCU" at 105.6,42.1 h1.5
  text "HV-" at 29,41.9 h2
  text "HV+" at 37,41.9 h2
  text "IMD" at 33,36.7 h2
  text "DB" at 79.78,34.5 h1.5
  text "SD" at 88.78,34.5 h1.5
  text "IMD Faults" at 79.3,30.9 h1.5
  text "DCDC / Active" at 32.968,29.8 h1.5
  text "+12V" at 78.354,26.554 h1.52
  text "+3.3V" at 76.954,24.054 h1.52
  text "GND" at 79.754,21.454 h1.52
  text "+5V" at 31.954,16.354 h1.52
  text "GND" at 31.954,13.654 h1.52
  text "Designed by: / Brayden McKeen" at 96.9,13 h1.52
  text "+12V" at 96.354,9.654 h1.52
  text "HV" at 15.2,2.9 h3
Board Outline:
  the board outline again, w0.5
CutOuts:
  lines w2: 3.2,11.4 8.2,11.4 12.3,7.3 12.3,4 ; 3.3,49.3 7.9,49.3 11.9,53.3 11.9,57.5 ; 49.6,48.2 49.6,27.2 56.6,20.2 56.6,7.9